# Altium PCB usbToUart.PcbDoc
Units mm, origin at the board's own origin, x right, y up, seen from the top; angles counter-clockwise.
Board outline 34.67 x 16 mm, 2 copper layers (Top Layer, Bottom Layer); 19 components, 16 nets, 71 pads, 8 vias.
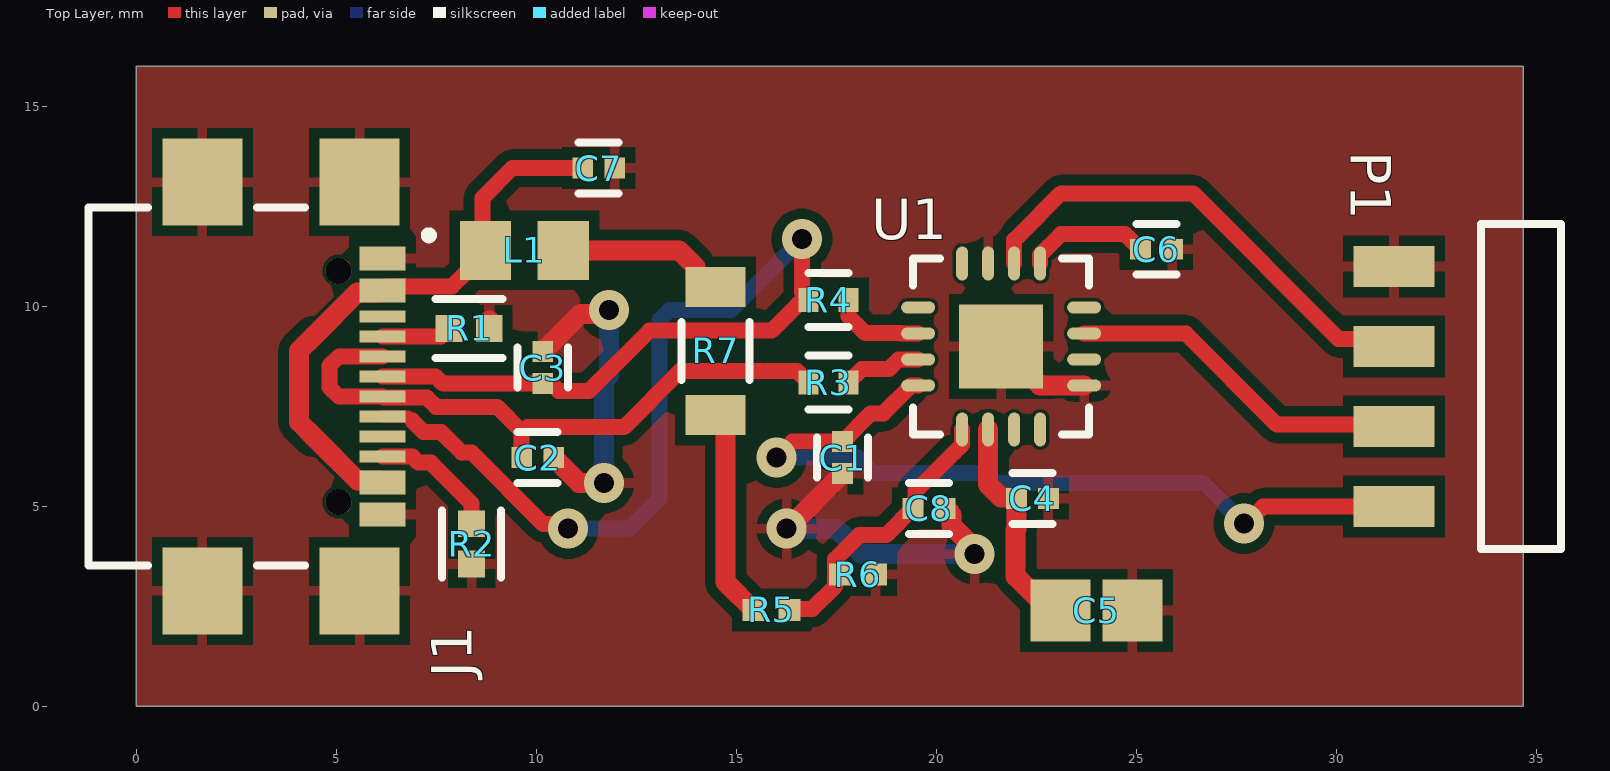
[diagram p0: Top Layer view]
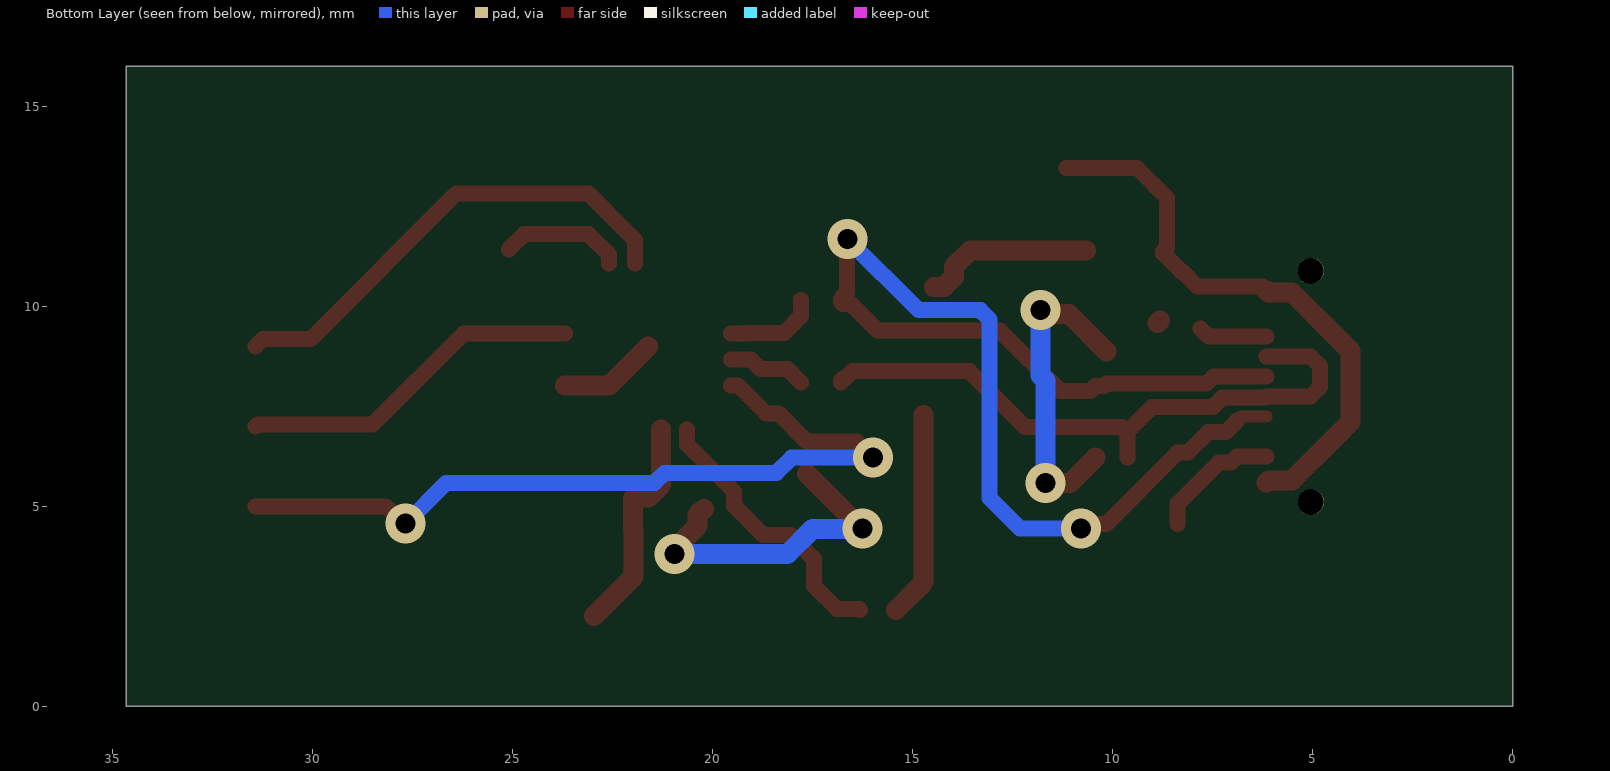
[diagram p1: Bottom Layer view, seen from below]
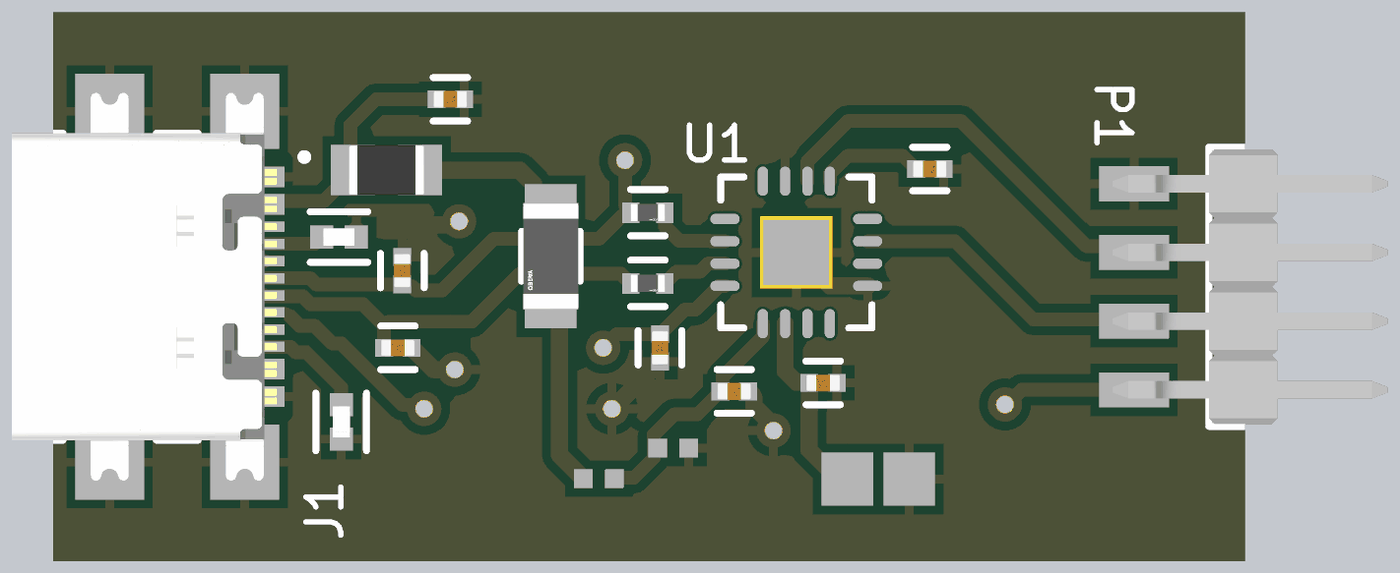
[diagram p2: 3D render of the assembled board from above, using the file's embedded part models]

## Layer stack, top to bottom
Top Solder: solder mask 0.0102, Solder Resist, Dk 3.5
Top Layer: signal copper 0.0356
Dielectric 1: dielectric 0.32, FR-4, Dk 4.8
Bottom Layer: signal copper 0.0356
Bottom Solder: solder mask 0.0102, Solder Resist, Dk 3.5

## Board outline
0,0 34.671,0 34.671,16.002 0,16.002

## Design rules (kind name [scope] priority, off if disabled: settings)
Clearance Clearance_1 [WithinRoom('USB') or WithinRoom('FTDI')] p1: gap=0.076 ignorepadtopadclearanceinfootprint=FALSE
Clearance usb_dp/dn [InNet('CON_USB_N') vs InNet('CON_USB_P')] p2: gap=0.127 ignorepadtopadclearanceinfootprint=FALSE
Clearance [All] p3: gap=0.254 ignorepadtopadclearanceinfootprint=FALSE
DiffPairsRouting [All] p1: maxlimit=2.54 minlimit=0.076 mostfreqgap=0.127 toplayer_minwidth=0.254 toplayer_maxwidth=2.54 toplayer_prefwidth=0.4 bottomlayer_minwidth=0.254 bottomlayer_maxwidth=2.54 bottomlayer_prefwidth=0.4 maxuncoupledlength=12.7
MinimumSolderMaskSliver [All] p1: minsoldermaskwidth=0.2
PolygonConnect [All] p1: connectstyle=Relief reliefconductorwidth=0.254 reliefentries=4 polygonreliefangle="90 Angle" airgapwidth=0.254
RoomDefinition USB [False vs False] p1: confinementstyle=ConfineIn formatcopy=TRUE lockcomponents=FALSE outline 4.433,11.811 6.897,11.811 6.897,4.191 4.433,4.191
RoomDefinition FTDI [False vs False] p2: confinementstyle=ConfineIn formatcopy=TRUE lockcomponents=FALSE outline 19.05,11.774 24.257,11.774 24.257,6.35 19.05,6.35
RoutingVias [All] p1: holewidth=0.5 width=1 viastyle="Through Hole" minholewidth=0.4 minwidth=1 maxholewidth=0.6 maxwidth=1.27
SolderMaskExpansion [All] p1: expansion=0 istentingtop=FALSE
SupplyNets "Schematic Supply Nets_4" [InNet('3V3OUT')] p1: voltage=0.000
SupplyNets "Schematic Supply Nets_3" [InNet('GND')] p2: voltage=0.000
SupplyNets "Schematic Supply Nets_2" [InNet('VCC')] p3: voltage=0.000
SupplyNets "Schematic Supply Nets_1" [InNet('VCCIO')] p4: voltage=0.000
SupplyNets "Schematic Supply Nets" [InNet('VBUS')] p5: voltage=0.000
Width Power [InNet('VCC')] p1: maxlimit=2.54 minlimit=0.254 preferedwidth=0.5 minimp=50.000000 maximp=50.000000 favimp=50.000000
Width [All] p2: maxlimit=2.54 minlimit=0.254 preferedwidth=0.4 minimp=50.000000 maximp=50.000000 favimp=50.000000
28 further rules are at their usual default settings.

## Classes and differential pairs
differential pair FTDI_USB: +FTDI_USB_P -FTDI_USB_N
differential pair CON_USB: +CON_USB_P -CON_USB_N

## Components (designator, comment, footprint, x,y, rotation, side; value= is the part's Value field where it differs from the comment)
C1 "0.1UF" FP-C0402-BB-MFG 17.653,6.223 r270 top value="0.10 μF"
C2 "47pF" FP-C0402-BB-MFG 10.033,6.223 r0 top value="47 pF"
C3 "47pF" FP-C0402-BB-MFG 10.16,8.471 r90 top value="47 pF"
C4 "0.1UF" FP-C0402-BB-MFG 22.4,5.2 r0 top value="0.10 μF"
C5 "4.7uF" CAPC2013X145X50ML20T25 24,2.4 r180 top
C6 "0.1UF" FP-C0402-BB-MFG 25.5,11.43 r0 top value="0.10 μF"
C7 "10nF" FP-C0402-BB-MFG 11.557,13.462 r0 top value="10,000 pF"
C8 "10nF" FP-C0402-BB-MFG 19.812,4.953 r0 top value="10,000 pF"
J1 "USB4110GFA" GCT_USB4110GFA 5.08,8 r270 top locked
L1 "MI0805K601R-10" LIRD-MI0805K601R-10-2_V 9.7,11.4 r0 top
P1 "MMT-104-01-T-SH" SMTC-MMT-104-01-X-SH 34.619,8 r270 top locked
R1 "5K1" FP-CRCW0402-e3-IPC_A 8.319,9.45 r0 top
R2 "5K1" FP-CRCW0402-e3-IPC_A 8.382,4.064 r270 top
R3 "27R" FP-AC0402-MFG 17.3,8.1 r0 top
R4 "27R" FP-AC0402-MFG 17.3,10.16 r0 top
R5 "10K" RESC1005X40X20NL05T10 15.875,2.413 r0 top
R6 "15K" RESC1005X40X20NL05T10 18.034,3.302 r0 top
R7 "0R" FP-AF1206-MFG 14.478,8.89 r270 top
U1 "FT230XQ-T" QFN-16_M 21.619,9 r270 top locked

## Footprints (in the part's own frame and the unit in brackets; to place one, negate y for a bottom-side part, rotate by r counter-clockwise, add the part's x,y. Pads: shape width x height; smd on the part's side, far side on the other; paste and mask are expansions set on the pad)
CAPC2013X145X50ML20T25 [mm] "Chip Capacitor, 2-Leads, Body 2.00x1.25mm, IPC Low Density"
  rect 1.5x1.55 smd: 1(-0.9,0) 2(0.9,0)
  body extent -1.1,-0.72 1.1,0.72, height 1.45
FP-AC0402-MFG [mm]
  rect 0.5x0.6 smd paste+0 mask+0: 1(-0.5,0) 2(0.5,0)
  silkscreen extent -0.5,-0.67 0.5,0.67, body extent -0.85,-0.4 0.85,0.4, height 0.25
FP-AF1206-MFG [mm]
  rect 1x1.5 smd paste+0 mask+0: 1(-1.6,0) 2(1.6,0)
  silkscreen extent -0.72,-0.85 0.72,0.85, body extent -2.2,-0.95 2.2,0.95, height 0.25
FP-C0402-BB-MFG [mm]
  rect 0.52x0.52 smd paste+0 mask+0: 1(-0.4,0) 2(0.4,0)
  silkscreen extent -0.5,-0.64 0.5,0.64, body extent -0.8,-0.4 0.8,0.4, height 0.25
FP-CRCW0402-e3-IPC_A [mm]
  rect 0.668x0.672 smd paste+0 mask+0: 1(-0.502,0) 2(0.502,0)
  silkscreen extent -0.84,-0.74 0.84,0.74, body extent -1.04,-0.54 1.04,0.54, height 0.25
GCT_USB4110GFA [mm]
  rect 0.6x1.15 smd: A1/B12(-3.2,1.075) A4/B9(-2.4,1.075) B1/A12(3.2,1.075) B4/A9(2.4,1.075)
  rect 0.3x1.15 smd: A5(-1.25,1.075) A6(-0.25,1.075) A7(0.25,1.075) A8(1.25,1.075) B5(1.75,1.075) B6(0.75,1.075) B7(-0.75,1.075) B8(-1.75,1.075)
  rect 2.18x2 smd: S1(-5.11,0.5) S2(5.11,0.5) S3(-5.11,-3.43) S4(5.11,-3.43)
  round 0.65 hole 0.65 unplated: ""(-2.89,-0.025) ""(2.89,-0.025)
  silkscreen extent -4.47,-6.28 4.47,2.33, body extent -5.65,-6.28 5.65,1.42, height 3.26
LIRD-MI0805K601R-10-2_V [mm] "Chip Bead, 2-Leads, Body 2.2 x1.45 mm"
  rect 1.285x1.47 smd: 1(-0.972,0) 2(0.972,0)
  body extent -1.1,-0.72 1.1,0.73, height 1.1
QFN-16_M [mm] "QFN, 16-Leads, Body 4x4mm, Pitch 0.65mm, Thermal Pad 2.1x2.1mm, IPC Low Density"
  oval 0.85x0.3 smd: 1(-2.075,0.975) 2(-2.075,0.325) 3(-2.075,-0.325) 4(-2.075,-0.975) 9(2.075,-0.975) 10(2.075,-0.325) 11(2.075,0.325) 12(2.075,0.975)
  oval 0.3x0.85 smd: 5(-0.975,-2.075) 6(-0.325,-2.075) 7(0.325,-2.075) 8(0.975,-2.075) 13(0.975,2.075) 14(0.325,2.075) 15(-0.325,2.075) 16(-0.975,2.075)
  rect 2.1x2.1 smd paste-1.05: 17(0,0)
  silkscreen extent -2.2,-2.2 2.2,2.2, body extent -2.05,-2.05 2.05,2.05, height 0.8
RESC1005X40X20NL05T10 [mm] "Chip Resistor, 2-Leads, Body 1.00x0.50mm, IPC Medium Density"
  rect 0.55x0.55 smd: 1(-0.45,0) 2(0.45,0)
  body extent -0.53,-0.27 0.53,0.28, height 0.4
SMTC-MMT-104-01-X-SH [mm] "Terminal Surface Mount Strip ASSEM, 1x4 Pins, Horizontal, 2mm Pitch, Male"
  rect 1.02x2.03 smd: 1(-3,-3.181) 2(-1,-3.181) 3(1,-3.181) 4(3,-3.181)
  silkscreen extent -4.07,-1.01 4.06,0.99, body extent -4,-3.8 4,4.19, height 1.92

## Part data
C1 C4 C6: library part CMP-03020-014070-2, "CAP CER 0.1UF 25V X5R 0402", Capacitance="0.10 μF", Manufacturer=Kemet, Manufacturer Part Number=C0402C104M3PAC7867, Package=C0402-BB, Temperature="-55°C to +125°C", Temperature Characteristic=X5R, Temperature Coefficient=15%, Temperature Range High=+125°C, Temperature Range Low=-55°C, Tolerance=0.2, Voltage Rating="25 V", Automotive=No, Category=Cap, ComponentLink2Description=Datasheet, ComponentLink2URL=https://content.kemet.com/datasheets/KEM_C1002_X7R_SMD.pdf, Device Class L1="Passive Components", Device Class L2=Capacitors, Device Class L3="Ceramic Capacitors", Digikey Description="CAP CER 0.1UF 25V X5R 0402", Height=0.55mm, Ipc Land Pattern Name=CAPC10050X50, Lead Free=Yes, Material=Ceramic, Octopart=https://octopart.com/c0402c104m3pac7867-kemet-84304880, RoHS=TRUE
C2 C3: library part CMP-03020-019736-1, "Cap Ceramic 47pF 25V X7R 5% Pad SMD 0402 125C Automotive T/R", Capacitance="47 pF", Manufacturer=Kemet, Manufacturer Part Number=C0402C470J3RACAUTO, Package=C0402-BB, Temperature="-55°C to +125°C", Temperature Characteristic=X7R, Temperature Coefficient=15%, Temperature Range High=+125°C, Temperature Range Low=-55°C, Tolerance=0.05, Voltage Rating="25 V", Automotive=No, Category=Cap, ComponentLink2Description=Datasheet, ComponentLink2URL=https://content.kemet.com/datasheets/KEM_C1002_X7R_SMD.pdf, Device Class L1="Passive Components", Device Class L2=Capacitors, Device Class L3="Ceramic Capacitors", Digikey Description="Cap Ceramic 47pF 25V X7R 5% Pad SMD 0402 125C Automotive T/R", Height=0.55mm, Ipc Land Pattern Name=CAPC10050X50, Lead Free=Yes, Material=Ceramic, Mouser Description="Cap Ceramic 47pF 25V X7R 5% Pad SMD 0402 125C Automotive T/R", Octopart=https://octopart.com/c0402c470j3racauto-kemet-86584164, RoHS=TRUE
C5: library part CMP-1036-04891-3, Manufacturer=Kemet, Part Number=C0805C475M4PACTU
C7 C8: library part CMP-03020-021286-1, "C0402 10,000 pF X7R 10.00% 50 V", Capacitance="10,000 pF", Manufacturer=Kemet, Manufacturer Part Number=C0402C103K5RAC, Package=C0402-BB, Temperature="-55°C to +125°C", Temperature Characteristic=X7R, Temperature Coefficient=15%, Temperature Range High=+125°C, Temperature Range Low=-55°C, Tolerance=0.1, Voltage Rating="50 V", Automotive=No, Category=Cap, ComponentLink2Description=Datasheet, ComponentLink2URL=https://content.kemet.com/datasheets/KEM_C1002_X7R_SMD.pdf, Device Class L1="Passive Components", Device Class L2=Capacitors, Device Class L3="Ceramic Capacitors", Height=0.55mm, Ipc Land Pattern Name=CAPC10050X50, Lead Free=Yes, Material=Ceramic, Mouser Description="Cap Ceramic 0.01uF 50V X7R 10% Pad SMD 0402 125C Bulk", Octopart=https://octopart.com/c0402c103k5rac-kemet-7501684, RoHS=TRUE
J1: "USB-C (USB TYPE-C) USB 2.0 Receptacle Connector 24 (16+8 Dummy) Position Surface Mount, Right Angle", Package=None, Check_prices=https://www.snapeda.com/parts/USB4110GFA/Global+Connector+Technology/view-part/?ref=eda, MF="Global Connector Technology", MP=USB4110GFA, SnapEDA_Link=https://www.snapeda.com/parts/USB4110GFA/Global+Connector+Technology/view-part/?ref=snap
L1: library part CMP-2000-05196-1, "Chip Bead for Power Filtering, 1500 mA, 600 Ohm, -40 to 125 degC, 0805 (2012 Metric), RoHS, Tape and Reel", Current Rating (Max)=1.5A, DC Resistance (DCR) (Max)=100mOhm, Impedance @ Frequency=600Ohm@100MHz, Manufacturer=Laird, Operating Temperature=-40degC~125degC, Package / Case=0805(2012Metric), Package Description="2-Pin Surface Mount Device, Body 2 x 1.25 mm", Package Reference=MI0805K601R-10-2, Ratings=-, Standard Package=1, Catalog Drawings=(HI,HZ,LI,MI)0805Series_1.10mmMax.Height, Category=Filters, Datasheet URL=https://datasheet.ciiva.com/3082/mi0805k601r-10-a-vp-3082219.pdf, Datasheet Version="Rev. A, 01/2004", Family=FerriteBeadsandChips, Filter Type=PowerLine, Height (Max)="0.043\"(1.10mm)", Kits=240-2227-ND-KITEMIFERRITEBEADCHIPSMD, Manufacturer URL=https://www.lairdtech.com, Mounting Type=SurfaceMount, Number of Lines=1, Online Catalog=MISeries, Other Names=240-2390-1, Packaging=CutTape(CT), Series=MI, Size / Dimension="0.079\"Lx0.049\"W(2.00mmx1.25mm)"
P1: library part CMP-1029-00049-1, "Horizontal Surface Mount Header, -55 to 105 degC, 2 mm Pitch, 4-Pin, Male, RoHS", Manufacturer=Samtec, Temperature Range="-55 to 105 degC", ComponentLink1Description="Manufacturer URL", ComponentLink1URL=http://www.samtec.com, ComponentLink2Description=Datasheet, ComponentLink2URL=http://d2a072wq521u33.cloudfront.net/catalog_english//MMT_SM.PDF, ComponentLink3Description="Package Specification", ComponentLink3URL=http://www.samtec.com/documents/webfiles/cpdf/MMT-1XX-XX-XX-XX-XX-XXX-X-XX-MKT.pdf, DatasheetVersion=F-214, Mounting Technology="Surface Mount", Orientation=Horizontal, PackageDescription="2mm Horizontal Terminal Surface Mount Strip ASSEM", PackageReference=MMT-104-01-X-SH, PackageVersion="CY, 12/2000", PartNumber=MMT-104-01-T-SH, Pitch="2 mm", RoHS=True
R1 R2: library part CMP-02407-004842-1, "RES Thick Film, 5.1kΩ, 5%, 0.063W, 200ppm/°C, 0402", Case/Package=0402, Max Operating Temperature=155°C, Max Power Dissipation=63mW, Min Operating Temperature=-55°C, Package Quantity=50000, Resistance=5.1kR, Temperature Coefficient=200ppm/°C, Tolerance=5%, Composition="Thick Film", Features="Automotive AEC-Q200", Height=0.016inch, Lead Free="Lead Free", Length=0.039inch, Number of Terminations=2, Packaging="Tape and Reel", Width=0.02inch
R3 R4: library part CMP-03412-042158-1, "RES 27Ω ±5% 0.063W 0402", Case/Package=0402, Max Operating Temperature=155°C, Max Power Dissipation=63mW, Min Operating Temperature=-55°C, Resistor Type="Thick Film", Temperature Coefficient=100ppm/°C, Tolerance=5%, Features="Moisture Resistant", Height=0.015inch, Length=0.039inch, Number of Terminations=2, Packaging="Tape and Reel", Resistance=27R, RoHS Compliant=Yes, Series=AC, Width=0.02inch
R5 R6: library part CMP-2002-01682-1, Manufacturer="Vishay BCcomponents", Part Number=TNPW040210K0DEED
R7: library part CMP-03412-039834-1, "Anti-Sulfurated Chip Resistor Automotive Grade 0Ω Jumper 0.25W 1206", Case/Package=1206, Max Operating Temperature=155°C, Max Power Dissipation=250mW, Min Operating Temperature=-55°C, Resistor Type="Thick Film", Tolerance=5%, Features="Moisture Resistant", Height=0.026inch, Length=0.122inch, Number of Terminations=2, Packaging="Tape and Reel", Resistance=0R, RoHS Compliant=Yes, Series=AF, Width=0.063inch
U1: library part CMP-0248-00009-2, "USB to Basic UART Interface Chip, UHCI/OHCI/EHCI Compatible, USB 2.0 Compatible, -40 to +85 degC, 16-Pin QFN, Pb-Free, Tray", Manufacturer=FTDI, Code_JEDEC=MO-220WGGC, ComponentLink1Description="Manufacturer URL", ComponentLink1URL=http://www.ftdichip.com/, ComponentLink2Description=Datasheet, ComponentLink2URL=http://www.ftdichip.com/Support/Documents/DataSheets/ICs/DS_FT230X.pdf, ComponentLink3Description="FT230X Product Page", ComponentLink3URL=www.ftdichip.com/Products/ICs/FT230X.html, DatasheetVersion="ver 1.2, Feb-2013", PackageDescription="16-Pin Quad Flat No-Lead, 4x4 mm Body, 0.65 mm Pitch", PackageReference=QFN-16, PackageVersion=Feb-13, PartNumber=FT230XQ-T, RevisionNote="DatasheetVersion updated to 1.2 Feb-2013"

## Via types
v1: diameter 1, hole 0.5, Top Layer to Bottom Layer, tented both sides, 8 vias

## Nets (pads, with @x,y where several pads share a name; then routed paths per layer and width w, separated by ;. In a path a pad name is that pad's centre, name@x,y a point inside that pad or via, vN(x,y) a via of type N, cw(c..) or ccw(c..) an arc to the next point about the centre after c; other vN are vias at no path point)
3V3OUT: C1.1 P1.4 U1.8 | length 20.6
  Top Layer w0.4: v1(16.002,6.223) 16.402,6.623 C1.1 18.359,7.329 18.673,7.329 19.369,8.025 U1.8 ; v1(27.686,4.572) 27.743,4.572 28.171,5 P1.4
  Bottom Layer w0.4: v1(16.002,6.223) 18.034,6.223 18.415,5.842 21.209,5.842 21.463,5.588 26.67,5.588 v1(27.686,4.572)
CON_USB_N: C2.1 J1.A7 J1.B7 R3.1 | length 15.8
  Top Layer w0.4: J1.A7 5.06,7.75 4.826,7.984 4.826,8.516 5.06,8.75 J1.B7 ; J1.A7@6.182,7.723 6.897,7.723 7.263,7.723 7.493,7.493 8.008,7.493 8.01,7.491 9.019,7.491 9.652,6.858 ; C2.1 9.633,6.839 9.652,6.858 ; R3.1 16.8,8.15 16.75,8.2 16.698,8.2 16.516,8.382 13.589,8.382 12.192,6.985 9.779,6.985 9.652,6.858
CON_USB_P: C3.1 J1.A6 J1.B6 R4.1 | length 30.5
  Top Layer w0.3: J1.B6 6.791,7.25 6.897,7.144
  Top Layer w0.4: J1.A6 7.481,8.25 7.66,8.071 C3.1 10.22,8.011 10.438,8.011 10.557,7.892 11.321,7.892 12.827,9.398 15.881,9.398 16.543,10.06 16.75,10.06 16.8,10.11 R4.1 ; 6.897,7.144 7.183,6.858 7.62,6.858 8.128,6.35 8.382,6.35 10.172,4.56 10.68,4.56 v1(10.795,4.445) ; v1@16.643,11.678 16.643,10.367 16.75,10.26 R4.1@16.75,10.238
  Bottom Layer w0.4: v1(10.795,4.445) 12.319,4.445 13.081,5.207 13.081,9.672 13.315,9.906 14.859,9.906 v1(16.637,11.684)
FTDI_USB_N: R3.2 U1.7 | length 2
  Top Layer w0.4: R3.2 18.141,8.441 18.816,8.441 19.05,8.675 U1.7
FTDI_USB_P: R4.2 U1.6 | length 2.3
  Top Layer w0.4: R4.2 17.8,9.759 18.223,9.336 19.115,9.336 19.125,9.325 U1.6
GND: C1.2 C2.2 C3.2 C4.2 C5.1 C6.2 C7.2 C8.2 J1.A1/B12 J1.B1/A12 J1.S1 J1.S2 J1.S3 J1.S4 P1.1 R1.2 R2.2 R6.2 U1.3 U1.13 U1.17 | length 19.1
  Top Layer w0.4: C8.2 20.272,4.893 C8.2@20.38,4.893
  Top Layer w0.5: R1.2@8.821,9.652 R1.2@8.885,9.588 ; C3.2 11.099,9.81 11.715,9.81 v1(11.811,9.906) ; C2.2 11.068,5.588 v1(11.684,5.588) ; v1(16.256,4.445) 16.275,4.445 C1.2 ; C8.2@20.222,4.943 20.38,4.785 20.38,4.52 20.955,3.945 v1(20.955,3.81) ; U1.17 22.594,8.025 U1.13
  Bottom Layer w0.5: v1@11.684,5.616 11.684,8.152 11.811,8.279 v1(11.811,9.906) ; v1(16.256,4.445) 16.26,4.441 17.506,4.441 18.137,3.81 v1(20.955,3.81)
NetC7_1: C7.1 J1.A4/B9 J1.B4/A9 L1.1 | length 14.4
  Top Layer w0.4: J1.A4/B9 6.255,10.5 6.897,10.5 7.889,10.5 8.254,10.865 8.285,10.865 8.745,11.325 8.745,11.377 8.647,11.476 8.647,12.711 9.398,13.462 C7.1
  Top Layer w0.5: J1.B4/A9 6.105,5.65 5.526,5.65 4.433,6.743 4.064,7.112 4.064,8.89 4.433,9.259 5.524,10.35 6.105,10.35 J1.A4/B9
NetC8_1: C8.1 R5.2 R6.1 U1.9 | length 7
  Top Layer w0.4: R5.2 16.351,2.439 16.898,2.439 17.468,3.009 17.468,3.683 18.067,4.282 18.741,4.282 19.472,5.013 19.472,5.375 20.447,6.35 20.644,6.547 U1.9
NetJ1_A5: J1.A5 R1.1 | length 1.7
  Top Layer w0.4: J1.A5 7.617,9.25 7.681,9.314 7.683,9.314 R1.1 R1.1
NetJ1_B5: J1.B5 R2.1 | length 3.2
  Top Layer w0.4: J1.B5 6.897,6.25 7.051,6.096 7.36,6.096 8.382,5.074 R2.1
NetL1_2: L1.2 R7.1 | length 4.3
  Top Layer w0.5: L1.2 13.568,11.4 13.978,10.99 13.978,10.74 14.228,10.49 R7.1
NetP1_2: P1.2 U1.2 | length 12.1
  Top Layer w0.4: U1.2 21.944,11.657 22.061,11.774 23.114,12.827 26.416,12.827 30.058,9.185 31.253,9.185 P1.2
NetP1_3: P1.3 U1.15 | length 8.7
  Top Layer w0.4: U1.15 26.235,9.325 28.511,7.048 31.39,7.048 P1.3
VBUS: R5.1 R7.2 | length 5.2
  Top Layer w0.5: R7.2@14.732,7.29 14.732,3.106 R5.1
VCC: C4.1 C5.2 U1.10 | length 5.6
  Top Layer w0.5: U1.10 21.294,5.544 21.618,5.22 21.814,5.22 21.824,5.21 21.99,5.21 C4.1 22,4.426 21.982,4.408 21.982,3.254 C5.2@22.968,2.268
VCCIO: C6.1 U1.1 | length 3.1
  Top Layer w0.4: U1.1 22.594,11.291 23.077,11.774 23.114,11.811 24.719,11.811 C6.1
pads on no net: J1. J1.A8 J1.B8 U1.4 U1.5 U1.11 U1.12 U1.14 U1.16

## Polygon pours and split planes (outlines as drawn)
GND on Top Layer "GND" (solid, remove dead copper, pour order 0): 0,0 0,16 34.671,16 34.671,0